# Altium PCB HS-IO-BaseBoard.PcbDoc (part 3 of 4)
Units mm, origin at the board's own origin, x right, y up, seen from the top; angles counter-clockwise.
Board outline 157.7 x 86.4 mm, 6 copper layers (Top Layer, MidLayer1, InternalPlane1, InternalPlane2, MidLayer2, Bottom Layer); 214 components, 240 nets, 782 pads, 260 vias.
Unrouted connection lines stored in the file: 101.
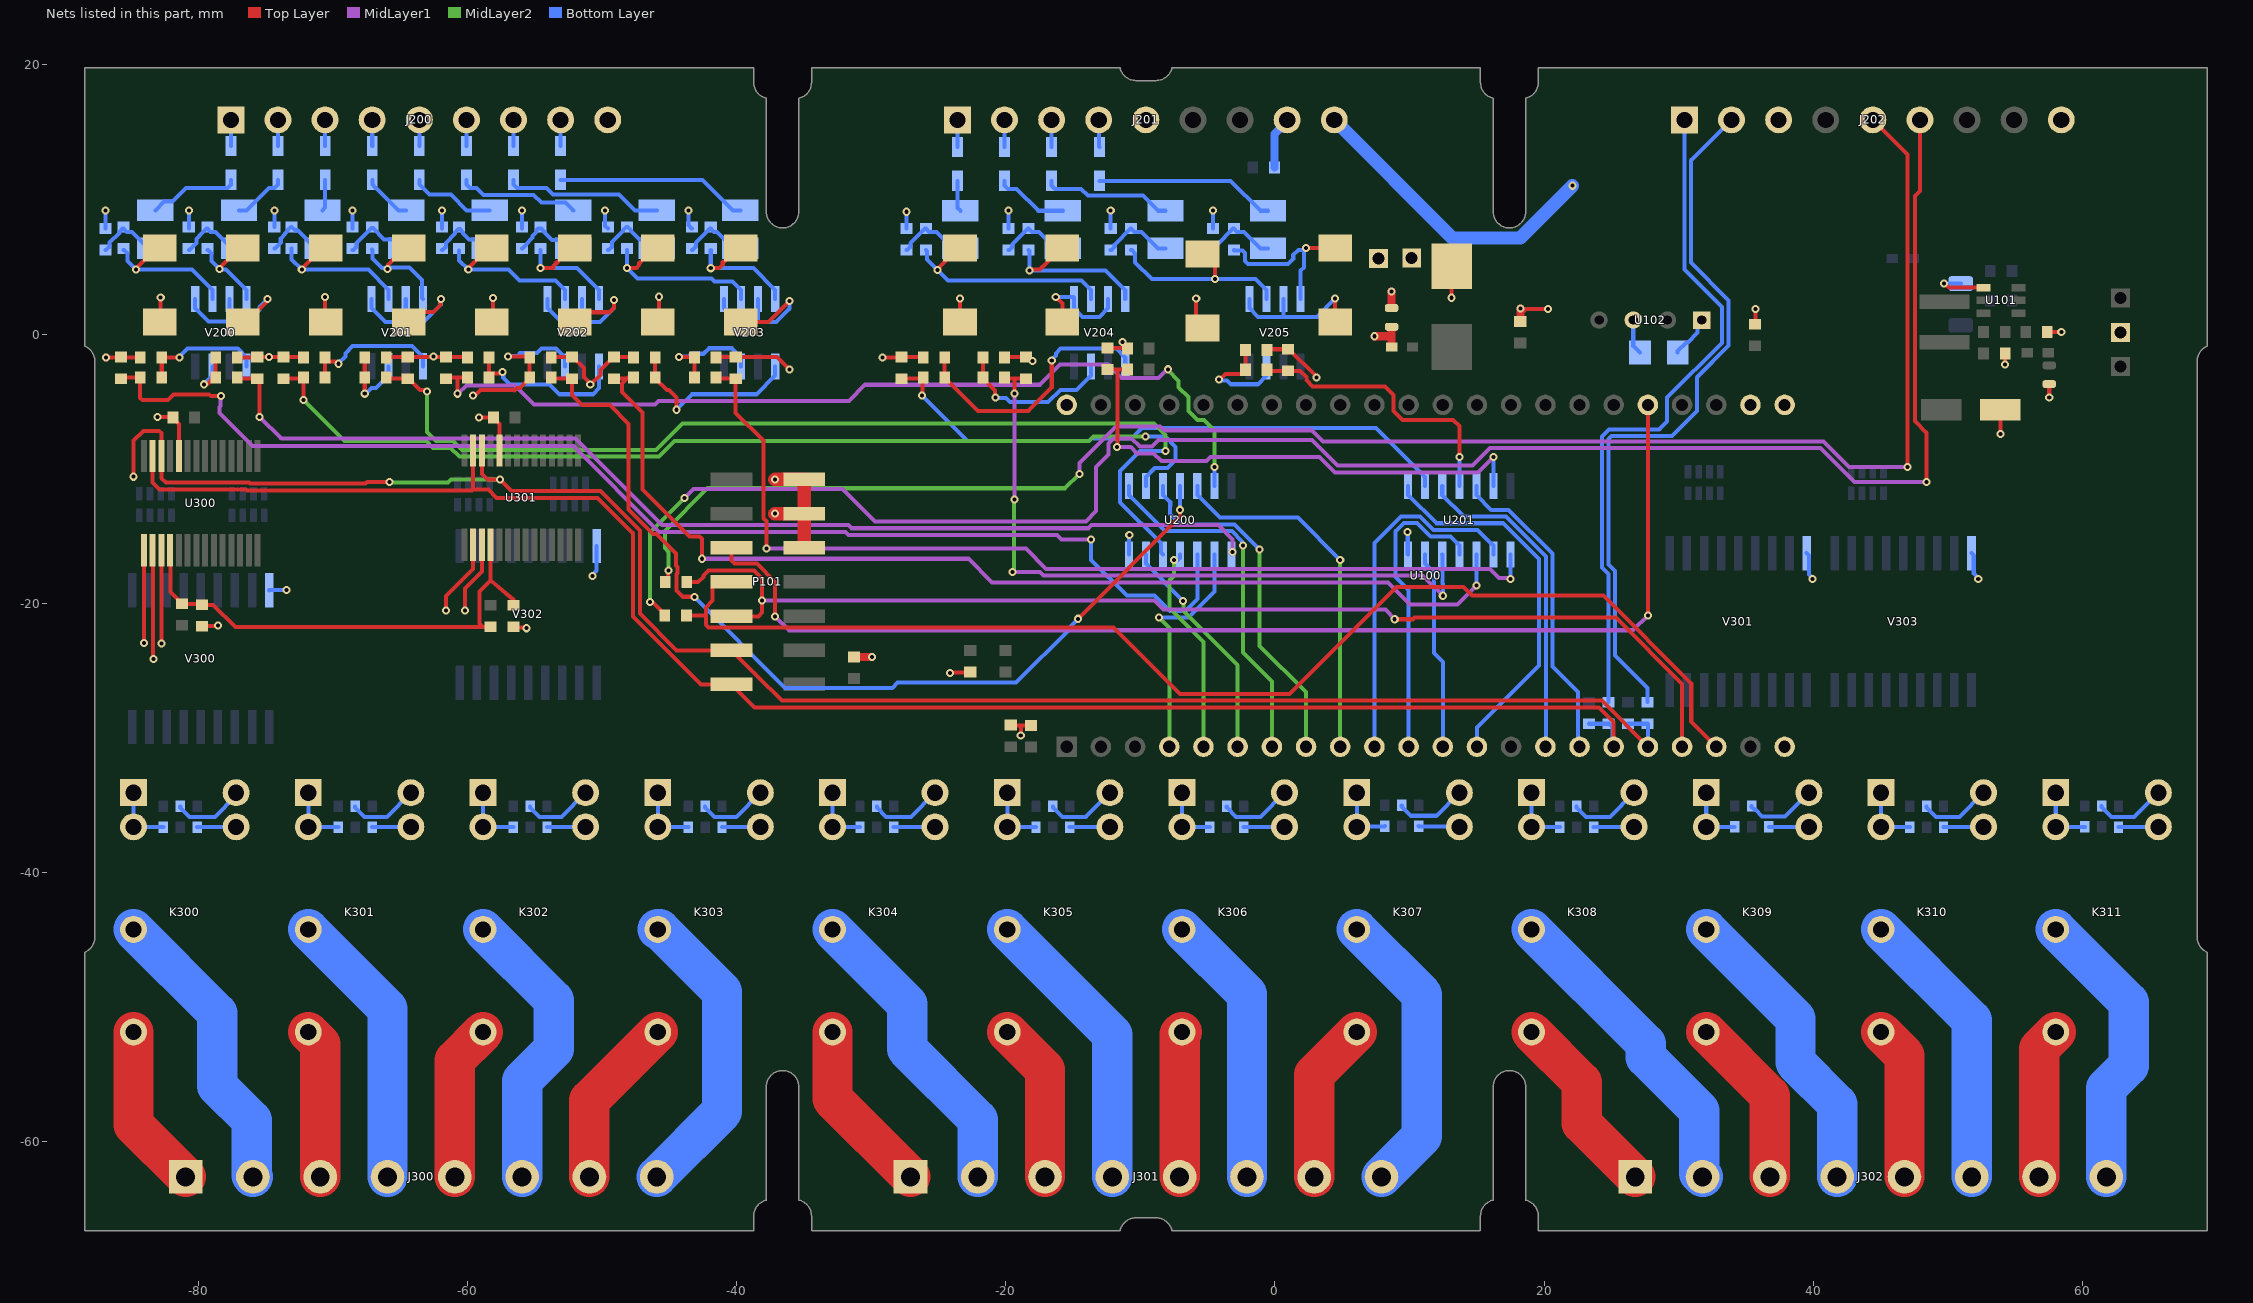
[diagram p6: the nets of this part, all layers, seen from the top]

## Via types
v1: diameter 0.6, hole 0.3, Top Layer to Bottom Layer, 260 vias

## Nets (pads, with @x,y where several pads share a name; then routed paths per layer and width w, separated by ;. In a path a pad name is that pad's centre, name@x,y a point inside that pad or via, vN(x,y) a via of type N, cw(c..) or ccw(c..) an arc to the next point about the centre after c; other vN are vias at no path point) (continued)
Gnd: C101.1 C102.2 C103.2 C104.2 C105.2 C106.1 C110.1 C111.2 C112.1 C113.1 C114.1 C200.2 C201.2 C202.2 C203.2 C204.2 C205.2 C206.2 C207.2 C208.2 C209.2 C210.2 C211.2 C300.1 C301.1 C302.1 C303.1 Gnd.1 J201.8 J201.9 J202.3 J202.9 P101.9 P101.11 P101.13 R102.1 R200.2 R204.2 R208.2 R212.2 R216.2 R220.2 R224.2 R228.2 R232.2 R236.2 R240.2 R244.2 U100.22 U100.23 U100.24 U100.44 U101.1 U102.1 U200.7 U201.7 U300.10 U300.15 U300.16 U300.17 U301.10 U301.16 U301.17 V300.9 V301.9 V302.9 V303.9 | length 149.1
  Top Layer w0.3: v1@-86.833,-1.729 R204.2@-84.325,-1.729 ; v1(-84.029,-22.946) U300.15@-84.029,-16.058 ; U300.16@-83.379,-16.058 -83.354,-16.083 -83.354,-24.115 v1(-83.329,-24.14) ; v1(-83.029,-6.15) -81.911,-6.15 C301.1@-81.864,-6.196 ; v1(-82.729,-22.983) U300.17@-82.729,-16.058 ; C301.1@-81.864,-6.246 -81.429,-6.682 U300.10@-81.429,-9.058 ; C302.1@-79.704,-21.698 -79.679,-21.673 -78.559,-21.673 v1(-78.534,-21.648) ; R200.2@-77.078,-1.729 C200.2@-75.63,-1.729 ; C200.2@-75.609,-1.708 -75.605,-1.704 -74.728,-1.704 v1(-74.724,-1.701) -74.72,-1.704 -73.672,-1.704 C203.2@-73.668,-1.708 -72.211,-1.708 R212.2@-72.168,-1.751 ; R208.2@-66.022,-1.751 -65.98,-1.708 C202.2@-64.427,-1.708 -62.548,-1.708 v1(-62.506,-1.667) -62.485,-1.688 -61.6,-1.688 C205.2@-61.579,-1.708 -60.025,-1.708 R220.2@-59.983,-1.751 ; v1(-61.6,-20.548) -61.6,-19.47 -59.565,-17.435 U301.16@-59.565,-15.641 ; v1(-60.188,-20.548) -60.188,-18.913 -58.915,-17.641 U301.17@-58.915,-15.641 ; v1(-59.14,-6.196) C303.1@-58.054,-6.196 -58.054,-6.246 -57.615,-6.685 U301.10@-57.615,-8.641 ; C300.1@-56.579,-21.748 -56.528,-21.799 -55.657,-21.799 v1(-55.606,-21.85) ; R216.2@-53.769,-1.751 -53.727,-1.708 -52.169,-1.708 -51.348,-2.53 -51.348,-3.197 -50.867,-3.678 v1(-50.867,-3.759) -50.842,-3.759 -50.121,-3.038 -50.121,-2.679 -49.151,-1.708 -47.689,-1.708 R228.2@-47.647,-1.751 ; R224.2@-41.516,-1.751 -41.474,-1.708 -37.004,-1.708 v1(-36.071,-2.642) ; v1(-29.15,-1.751) -29.129,-1.729 -27.773,-1.729 C209.2@-27.752,-1.708 -26.179,-1.708 R236.2@-26.137,-1.751 ; v1(-24.137,-25.178) -24.098,-25.14 -22.672,-25.14 C114.1@-22.633,-25.102 ; R232.2@-20.097,-1.751 -20.055,-1.708 C208.2@-18.443,-1.708 ; C112.1@-19.628,-29.048 -19.616,-29.061 -18.874,-29.061 ; v1(-18.886,-29.829) -18.874,-29.817 -18.874,-29.061 ; C208.2@-18.493,-1.708 C208.2@-18.443,-1.708 ; C111.2@-18.119,-29.073 -18.131,-29.061 -18.874,-29.061 ; v1(-18,-2) -18.076,-2.076 C208.2@-18.443,-1.708 ; C211.2@-12.454,-1.022 -10.999,-1.022 R244.2@-10.957,-1.064 -10.957,-1.014 -11.337,-0.635 v1(-11.337,-0.591) ; R240.2@-0.592,-1.167 -0.55,-1.125 C210.2@0.983,-1.125 ; C210.2@1.033,-1.125 3.072,-3.164 v1(3.072,-3.233) ; C106.1@35.671,0.741 35.691,0.761 v1(35.691,1.852) ; v1(49.702,3.758) 49.783,3.758 50.088,3.452 U101.1@52.651,3.452 ; C102.2@53.896,-5.608 53.921,-5.633 v1(53.921,-7.408) ; v1(54.251,-2.266) C101.1@54.251,-1.448 ; R102.1@57.376,0.152 57.384,0.16 v1(58.421,0.16) ; v1(57.526,-4.72) C103.2@57.526,-3.72
  Top Layer w0.6: v1(-86.854,-1.751) v1@-86.833,-1.729 ; R204.2@-84.325,-1.729 R204.2@-84.304,-1.751 ; R200.2@-77.099,-1.751 R200.2@-77.078,-1.729 ; C113.1@-31.279,-23.983 -29.934,-23.983 v1(-29.929,-23.988)
  Top Layer w1: v1(-37.147,-13.328) P101.11@-34.979,-13.328 ; v1(-37.147,-10.8) -37.135,-10.788 P101.13@-34.979,-10.788 P101.11@-34.979,-13.328 ; P101.9@-34.979,-15.868 P101.11@-34.979,-13.328
  Bottom Layer w0.3: V300.9@-74.724,-19.028 -74.695,-18.999 v1(-73.446,-18.999) ; v1(-50.705,-17.967) -50.705,-17.886 -50.399,-17.579 V302.9@-50.399,-15.736 ; U200.7@-10.849,-16.375 -10.835,-16.361 -10.835,-14.952 v1(-10.822,-14.939) ; v1(9.845,-14.689) 9.868,-14.711 9.868,-16.353 U201.7@9.89,-16.375 ; C110.1@29.921,-1.366 29.921,-1.266 30.571,-0.616 30.671,-0.616 31.409,0.122 31.409,0.755 U102.1@31.701,1.046 ; V301.9@39.501,-16.278 39.668,-16.446 39.668,-17.861 39.932,-18.124 v1(39.932,-18.206) ; v1(49.702,3.758) 49.704,3.755 50.948,3.755 C105.2@50.951,3.752 ; V303.9@51.751,-16.278 51.918,-16.446 51.918,-17.792 52.251,-18.124 v1(52.251,-18.206)
  Bottom Layer w0.6: C104.2@-0.04,12.367 -0.04,14.865 0.91,15.815 J201.8@0.91,15.917
  Bottom Layer w1: J201.9@4.41,15.917 13.185,7.142 18.229,7.142 22.092,11.005 v1(22.092,11.025)
GPIO13: P101.6 R248.2 U100.19 | length 86.9
  Top Layer w0.3: R248.2@-43.7,-18.417 -42.85,-18.417 -42.462,-18.029 -42.462,-17.946 -42.074,-17.558 -38.684,-17.558 -38.096,-18.147 -38.096,-20.695 -38.366,-20.965 -40.363,-20.965 P101.6@-40.379,-20.948 ; v1(8.9,-21.185) 10.257,-21.185 10.383,-21.058 25.33,-21.058 30.25,-25.979 U100.19@30.25,-30.658
  MidLayer1 w0.3: v1(-38.096,-19.803) -8.945,-19.803 -8.281,-20.467 8.203,-20.467 8.9,-21.164 v1(8.9,-21.185)
GPIO14: P101.8 R249.2 U100.20 | length 93.1
  Top Layer w0.3: R249.2@-43.727,-20.894 -42.334,-20.894 -42.279,-20.948 ; P101.8@-40.379,-18.408 -41.429,-18.408 -41.779,-18.758 -41.779,-19.803 -42.279,-20.303 -42.279,-20.948 ; U100.20@32.79,-30.658 30.928,-28.796 30.928,-25.95 24.404,-19.425 14.659,-19.425 14.021,-18.787 9.013,-18.787 1.067,-26.733 -7.05,-26.733 -11.985,-21.798 -42.074,-21.798 -42.279,-21.593 -42.279,-20.948
GPIO21: P101.10 U100.27 | length 88.8
  Top Layer w0.3: P101.10@-40.379,-15.868 -40.379,-16.818 -40.139,-17.058 -38.477,-17.058 -37.129,-18.406 v1(-37.129,-20.978) ; v1(27.71,-20.9) U100.27@27.71,-5.258
  MidLayer1 w0.3: v1@-37.051,-21.057 -36.108,-22 26.61,-22 v1(27.71,-20.9)
  MidLayer2 w0.3: v1(-37.129,-20.978) v1@-37.051,-20.9
I01: D201.2 J200.1 | length 2
  Bottom Layer w0.3: D201.2@-77.568,13.967 J200.1@-77.568,15.917
I02: D203.2 J200.2 | length 2
  Bottom Layer w0.3: D203.2@-74.068,13.967 J200.2@-74.068,15.917
"I2C SCL": P101.4 R105.1 R253.2 U100.18 U300.12 U301.12 | length 137.5
  Top Layer w0.3: v1(-84.799,-10.594) -84.799,-7.909 -84.075,-7.184 -82.905,-7.184 -82.729,-7.36 U300.12@-82.729,-9.058 -82.729,-10.708 -82.402,-11.035 -76.229,-11.035 -76.156,-11.108 -67.567,-11.108 -67.434,-10.976 v1(-65.772,-10.976) ; U301.12@-58.915,-8.641 -58.915,-10.379 -58.506,-10.788 -57.591,-10.788 v1(-57.588,-10.788) ; v1(-57.588,-10.788) -56.718,-11.658 -50.108,-11.658 -47.179,-14.588 -47.179,-20.771 -44.462,-23.488 P101.4@-40.379,-23.488 -38.689,-25.178 -38.684,-25.178 -38.479,-25.383 -38.479,-25.388 -36.634,-27.233 24.285,-27.233 U100.18@27.71,-30.658
  MidLayer2 w0.3: v1(-65.772,-10.976) -65.732,-11.016 -61.427,-11.016 -61.199,-10.788 v1(-57.588,-10.788)
  Bottom Layer w0.3: R105.1@26.229,-28.948 R253.2@27.683,-28.948 27.71,-28.975 U100.18@27.71,-30.658
"I2C SCL_1": J202.2 R253.1 | length 53.2
  Bottom Layer w0.3: R253.1@27.683,-27.348 27.683,-26.287 25.275,-23.879 25.275,-17.613 24.788,-17.126 24.788,-7.808 25.018,-7.578 29.503,-7.578 31.362,-5.719 31.362,-3.204 33.714,-0.853 33.714,2.513 30.921,5.306 30.921,12.917 J202.2@33.921,15.917
"I2C SDA": P101.2 R104.1 R252.2 U100.17 U300.13 U301.13 | length 129.6
  Top Layer w0.3: U300.13@-83.379,-9.058 -83.378,-9.06 -83.378,-11.012 -82.854,-11.535 -76.436,-11.535 -76.363,-11.608 -67.234,-11.608 -67.217,-11.626 -59.656,-11.626 -59.565,-11.535 -58.446,-11.535 ; -59.565,-11.505 U301.13@-59.565,-8.641 ; -58.425,-11.557 -57.823,-12.158 -50.316,-12.158 -47.679,-14.795 -47.679,-20.978 -42.629,-26.028 P101.2@-40.379,-26.028 -38.674,-27.733 24.078,-27.733 25.17,-28.826 U100.17@25.17,-30.658
  Bottom Layer w0.3: R104.1@23.321,-28.948 R252.2@24.775,-28.948 ; R252.2@24.825,-28.948 25.075,-29.198 25.075,-30.563 U100.17@25.17,-30.658
"I2C SDA_1": J202.1 R252.1 | length 50.5
  Bottom Layer w0.3: R252.1@24.775,-27.348 24.775,-17.82 24.288,-17.333 24.288,-7.601 24.811,-7.078 28.551,-7.078 29.138,-6.491 29.138,-4.721 33.214,-0.646 33.214,2.009 30.421,4.801 J202.1@30.421,15.917
I2C_R\E\S\E\T\: C300.2 C302.2 R302.1 R306.1 U300.18 U301.18 | length 37.2
  Top Layer w0.3: U300.18@-82.079,-16.058 -82.054,-16.084 -82.054,-19.176 R302.1@-81.204,-20.025 ; R302.1@-81.226,-20.003 -81.168,-20.062 -79.741,-20.062 -79.694,-20.108 -78.879,-20.108 -77.239,-21.748 -58.842,-21.748 ; R306.1@-58.269,-21.748 -58.842,-21.748 ; U301.18@-58.265,-15.641 -58.265,-18.309 ; C300.2@-56.579,-20.148 -56.579,-19.73 -58.265,-18.309 ; -58.842,-21.748 -59.092,-21.498 -59.092,-19.136 -58.265,-18.309
I03: D205.2 J200.3 | length 2
  Bottom Layer w0.3: J200.3@-70.568,15.917 -70.563,15.911 -70.563,13.972 D205.2@-70.558,13.967
I04: D207.2 J200.4 | length 2
  Bottom Layer w0.3: J200.4@-67.068,15.917 -67.065,15.913 -67.065,13.97 D207.2@-67.061,13.967
I05: D209.2 J200.5 | length 2
  Bottom Layer w0.3: J200.5@-63.568,15.917 J200.5@-63.568,15.917 -63.566,13.968 D209.2@-63.565,13.967
I5V: C109.1 D200.2 D202.2 D204.2 D206.2 D208.2 D210.2 D212.2 D214.2 D216.2 D218.2 D220.2 D222.2 I5V.1 L103.2 R201.1 R205.1 R209.1 R213.1 R217.1 R221.1 R225.1 R229.1 R233.1 R237.1 R241.1 R245.1 V200.1 V200.3 V201.1 V201.3 V202.1 V202.3 V203.1 V203.3 V204.1 V204.3 V205.1 V205.3 | length 99.6
  Top Layer w0.3: D200.2@-82.854,0.891 -82.779,0.966 v1(-82.779,2.736) ; D202.2@-76.686,0.891 -76.436,0.891 -74.894,2.434 -74.894,2.543 v1(-74.836,2.6) ; v1(-70.568,2.745) -70.568,0.941 D204.2@-70.519,0.891 ; D206.2@-64.351,0.891 -63.609,1.633 -62.511,1.633 -61.983,2.162 -61.983,2.594 v1(-61.969,2.608) ; D208.2@-58.183,0.891 -58.088,0.987 v1(-58.088,2.676) ; D210.2@-52.015,0.891 -51.281,1.625 -49.425,1.625 -49.107,1.943 v1(-49.107,2.527) ; D212.2@-45.847,0.891 -45.76,0.979 v1(-45.76,2.777) ; D214.2@-39.679,0.891 -39.665,0.905 -37.612,0.905 v1(-36.071,2.446) ; D216.2@-23.402,0.741 v1(-23.402,2.642) ; v1(-16.285,2.767) -15.793,2.274 D218.2@-15.793,0.741 ; v1(-5.848,2.641) -5.848,0.908 D220.2@-5.383,0.442 ; D222.2@4.478,0.825 v1(4.478,2.641)
  Top Layer w0.6: v1(7.401,-0.159) 8.669,-0.159 ; L103.2@8.669,-0.959 8.669,-0.159 ; C109.1@8.669,0.541 8.669,-0.159
  Bottom Layer w0.3: R201.1@-86.879,7.842 v1(-86.879,9.192) ; R205.1@-80.693,7.842 v1(-80.693,9.192) ; V200.1@-80.216,2.6 -80.216,1.925 -79.233,0.941 -77.662,0.941 ; V200.3@-77.676,2.6 -77.676,0.956 -77.662,0.941 ; v1(-74.836,2.6) -75.428,2.009 -75.428,1.809 -76.295,0.941 -77.662,0.941 ; R209.1@-74.343,7.967 -74.318,7.992 v1(-74.318,9.192) ; R213.1@-68.519,7.842 v1(-68.519,9.192) ; V201.1@-67.116,2.608 -67.116,1.933 -66.074,0.891 -64.601,0.891 ; V201.3@-64.576,2.608 -64.576,0.916 -64.601,0.891 ; v1(-61.969,2.608) -61.983,2.594 -61.983,2.162 -63.253,0.891 -64.601,0.891 ; R217.1@-61.889,7.842 v1(-61.889,9.192) ; R221.1@-55.951,7.842 v1(-55.951,9.192) ; V202.1@-54.029,2.6 -54.029,1.925 -52.996,0.891 -51.503,0.891 ; V202.3@-51.489,2.6 -51.489,0.905 -51.503,0.891 ; v1(-49.765,9.192) -49.765,8.045 R225.1@-49.557,7.837 ; v1(-49.107,2.527) -49.107,1.943 -50.158,0.891 -51.503,0.891 ; v1(-43.579,9.192) -43.579,8.103 -43.329,7.853 R229.1@-43.313,7.853 ; V203.1@-40.936,2.6 -40.936,1.925 -39.916,0.905 -38.429,0.905 ; V203.3@-38.396,2.6 -38.396,0.939 -38.429,0.905 ; v1(-36.071,2.446) -36.071,1.885 -37.051,0.905 -38.429,0.905 ; R233.1@-27.377,7.842 v1(-27.377,9.092) ; R237.1@-19.788,7.842 v1(-19.788,9.192) ; v1@-16.119,2.6 v1(-16.285,2.767) -14.982,2.767 -14.932,2.717 -14.932,1.925 -14.282,1.275 -13.042,1.275 -12.392,1.925 V204.3@-12.392,2.6 ; R241.1@-12.2,7.842 v1(-12.2,9.192) ; R245.1@-4.611,7.842 v1(-4.611,9.192) ; V205.1@-1.895,2.6 -1.895,1.925 -1.245,1.275 0.645,1.275 ; V205.3@0.645,2.6 0.645,1.275 ; v1(4.478,2.641) 3.111,1.275 0.645,1.275
I06: D211.2 J200.6 | length 2
  Bottom Layer w0.3: D211.2@-60.068,13.967 J200.6@-60.068,15.917
I07: D213.2 J200.7 | length 2
  Bottom Layer w0.3: D213.2@-56.572,13.967 -56.57,13.969 -56.57,15.915 J200.7@-56.568,15.917
I08: D215.2 J200.8 | length 2
  Bottom Layer w0.3: D215.2@-53.076,13.967 -53.072,13.97 -53.072,15.913 J200.8@-53.068,15.917
I09: D217.2 J201.1 | length 2
  Bottom Layer w0.3: D217.2@-23.59,13.892 J201.1@-23.59,15.917
I10: D219.2 J201.2 | length 2
  Bottom Layer w0.3: D219.2@-20.09,13.892 J201.2@-20.09,15.917
I11: D221.2 J201.3 | length 2
  Bottom Layer w0.3: D221.2@-16.59,13.892 J201.3@-16.59,15.917
I12: D223.2 J201.4 | length 2.1
  Bottom Layer w0.3: J201.4@-13.09,15.917 -13.059,15.885 -13.059,13.923 D223.2@-13.027,13.892
I-GND: C107.2 C108.1 C109.2 C110.2 I-GND.1 J200.9 J201.5 U102.3 | length 9.9
  Top Layer w0.3: v1(13.129,2.702) C107.2@13.129,5.041 ; C108.1@18.229,0.941 18.229,1.464 18.635,1.87 v1(20.283,1.87)
  Top Layer w0.6: C109.2@8.669,1.941 v1(8.669,3.161) ; C108.1@18.229,0.941 v1(18.229,1.912)
  Bottom Layer w0.3: U102.3@26.621,1.046 26.621,-0.866 C110.2@27.121,-1.366
INP1: U100.4 U200.2 | length 17.6
  MidLayer2 w0.3: v1(-8.609,-21.058) -7.85,-21.818 U100.4@-7.85,-30.658
  Bottom Layer w0.3: v1(-8.609,-21.058) -6.433,-21.058 -4.499,-19.124 U200.2@-4.499,-16.375
INP2: U100.5 U200.4 | length 15.8
  MidLayer2 w0.3: v1(-7.509,-16.787) -7.509,-17.957 -7.839,-18.287 -7.839,-20.348 -5.31,-22.878 U100.5@-5.31,-30.658
  Bottom Layer w0.3: v1(-7.509,-16.787) -7.189,-16.787 -7.039,-16.637 U200.4@-7.039,-16.375
INP3: U100.6 U200.6 | length 17.1
  MidLayer2 w0.3: v1(-6.818,-19.817) -6.803,-19.833 -6.803,-20.567 -2.77,-24.601 U100.6@-2.77,-30.658
  Bottom Layer w0.3: U200.6@-9.579,-16.375 -9.579,-17.05 -6.818,-19.811 v1(-6.818,-19.817)
INP4: U100.7 U200.8 | length 26.7
  MidLayer2 w0.3: v1(-2.377,-15.69) -2.377,-23.646 -0.23,-25.793 U100.7@-0.23,-30.658
  Bottom Layer w0.3: U200.8@-10.849,-11.275 -10.849,-11.95 -8.165,-14.634 -3.2,-14.634 -2.434,-15.4 -2.434,-15.633 v1(-2.377,-15.69)
INP5: U100.8 U200.10 | length 26.1
  MidLayer2 w0.3: v1(-1.132,-16.015) -1.132,-23.159 2.31,-26.602 U100.8@2.31,-30.658
  Bottom Layer w0.3: U200.10@-8.309,-11.275 -8.309,-11.95 -7.779,-12.48 -7.779,-12.729 -7.789,-12.739 -7.789,-13.361 -7.016,-14.134 -3.433,-14.134 -2.993,-14.134 -1.132,-15.995 v1(-1.132,-16.015)
INP6: U100.9 U200.12 | length 27.2
  MidLayer2 w0.3: U100.9@4.85,-30.658 v1(4.85,-16.787)
  Bottom Layer w0.3: U200.12@-5.769,-11.275 -5.769,-11.95 -4.085,-13.634 1.698,-13.634 v1(4.85,-16.787)
INP7: U100.10 U201.2 | length 26.4
  Bottom Layer w0.3: U100.10@7.39,-30.658 7.39,-15.517 9.369,-13.539 10.771,-13.539 11.783,-14.55 15.049,-14.55 16.049,-15.55 16.09,-15.55 16.24,-15.7 U201.2@16.24,-16.375
INP8: U100.11 U201.4 | length 22.8
  Bottom Layer w0.3: U100.11@9.93,-30.658 9.93,-18.999 8.968,-18.037 8.968,-14.647 9.576,-14.039 10.564,-14.039 11.576,-15.05 13.05,-15.05 13.7,-15.7 U201.4@13.7,-16.375
INP9: U100.12 U201.6 | length 14.8
  Bottom Layer w0.3: U201.6@11.16,-16.375 11.16,-17.05 11.82,-17.71 11.82,-23.694 12.47,-24.344 U100.12@12.47,-30.658
INP10: U100.13 U201.8 | length 28.2
  Bottom Layer w0.3: U201.8@9.89,-11.275 9.89,-11.95 11.99,-14.05 16.955,-14.05 19.625,-16.72 19.625,-24.606 15.01,-29.221 U100.13@15.01,-30.658
INP11: U100.15 U201.10 | length 24.4
  Bottom Layer w0.3: U201.10@12.43,-11.275 12.43,-11.95 14.03,-13.55 17.162,-13.55 20.125,-16.513 20.125,-30.624 U100.15@20.09,-30.658
INP12: U100.16 U201.12 | length 23.3
  Bottom Layer w0.3: U201.12@14.97,-11.275 14.97,-11.95 16.07,-13.05 17.369,-13.05 20.625,-16.306 20.625,-24.688 22.521,-26.583 22.521,-30.549 U100.16@22.63,-30.658
IO13: J202.5 R248.1 | length 128.1
  Top Layer w0.3: R248.1@-45.3,-18.417 -45.102,-18.219 -45.102,-17.616 v1(-45.044,-17.559) ; J202.5@44.421,15.917 46.988,13.349 v1(46.988,-9.879)
  MidLayer1 w0.3: v1(-14.527,-10.383) -14.527,-9.576 -11.822,-6.87 -9.722,-6.87 -9.714,-6.862 -8.526,-6.862 -8.247,-7.141 2.732,-7.141 3.567,-7.975 40.742,-7.975 42.646,-9.879 v1(46.988,-9.879)
  MidLayer2 w0.3: v1(-45.044,-17.559) -45.044,-16.189 -45.327,-15.906 -45.327,-14.618 -42.159,-11.45 -15.594,-11.45 v1(-14.527,-10.383)
IO14: J202.6 R249.1 | length 139.1
  Top Layer w0.3: v1(-46.44,-19.9) -46.383,-19.957 -46.213,-19.957 -45.327,-20.844 R249.1@-45.327,-20.894 ; J202.6@47.921,15.917 47.921,10.629 47.551,10.259 47.551,-6.458 48.421,-7.328 v1(48.421,-10.983)
  MidLayer1 w0.3: v1(-43.853,-12.166) -43.203,-11.516 -32.132,-11.516 -29.726,-13.922 -14.053,-13.922 -13.288,-13.157 -13.288,-9.872 -12.375,-8.959 -12.375,-8.131 -11.994,-7.75 -10.655,-7.75 -10.043,-8.362 -9.137,-8.362 -8.649,-7.875 2.759,-7.875 4.659,-9.775 14.667,-9.775 15.967,-8.475 40.535,-8.475 43.044,-10.983 v1(48.421,-10.983)
  MidLayer2 w0.3: v1(-46.44,-19.9) -46.44,-14.753 v1(-43.853,-12.166)
K1A: J300.1 K300.8 | length 12.4
  Top Layer w3: K300.8@-84.799,-51.848 -84.799,-58.738 J300.1@-80.929,-62.608
K1B: J300.2 K300.5 | length 22.1
  Bottom Layer w3: K300.5@-84.799,-44.228 -78.579,-50.448 -78.579,-55.858 -76.025,-58.413 -76.025,-62.513 J300.2@-75.929,-62.608
K2A: J300.3 K301.8 | length 11.1
  Top Layer w3: K301.8@-71.816,-51.848 -70.929,-52.736 J300.3@-70.929,-62.608
K2B: J300.4 K301.5 | length 20.8
  Bottom Layer w3: K301.5@-71.816,-44.228 -65.929,-50.116 J300.4@-65.929,-62.608
K3A: J300.5 K302.8 | length 11.6
  Top Layer w3: J300.5@-60.929,-62.608 -60.929,-53.944 K302.8@-58.834,-51.848
K3B: J300.6 K302.5 | length 21.5
  Bottom Layer w3: K302.5@-58.834,-44.228 -53.579,-49.483 -53.579,-53.108 -55.929,-55.458 J300.6@-55.929,-62.608
K4A: J300.7 K303.8 | length 12.9
  Top Layer w3: J300.7@-50.929,-62.608 -50.929,-56.927 K303.8@-45.851,-51.848
K4B: J300.8 K303.5 | length 22.4
  Bottom Layer w3: J300.8@-45.929,-62.608 -41.079,-57.758 -41.079,-48.858 -45.709,-44.228 K303.5@-45.851,-44.228
K5A: J301.1 K304.8 | length 13.2
  Top Layer w3: K304.8@-32.868,-51.848 -32.868,-56.819 J301.1@-27.079,-62.608
K5B: J301.2 K304.5 | length 22.8
  Bottom Layer w3: K304.5@-32.868,-44.228 -27.329,-49.768 -27.329,-53.108 -22.079,-58.358 J301.2@-22.079,-62.608
K6A: J301.3 K305.8 | length 11.9
  Top Layer w3: K305.8@-19.886,-51.848 -17.079,-54.655 J301.3@-17.079,-62.608
K6B: J301.4 K305.5 | length 21.6
  Bottom Layer w3: K305.5@-19.886,-44.228 -12.079,-52.035 J301.4@-12.079,-62.608
K7A: J301.5 K306.8 | length 10.8
  Top Layer w3: J301.5@-7.079,-62.608 -7.079,-52.025 K306.8@-6.903,-51.848
K7B: J301.6 K306.5 | length 20.4
  Bottom Layer w3: K306.5@-6.903,-44.228 -2.079,-49.052 J301.6@-2.079,-62.608
K8A: J301.7 K307.8 | length 12.1
  Top Layer w3: J301.7@2.921,-62.608 2.921,-55.008 K307.8@6.08,-51.848
K8B: J301.8 K307.5 | length 21.6
  Bottom Layer w3: K307.5@6.08,-44.228 10.921,-49.069 10.921,-59.598 7.921,-62.598 J301.8@7.921,-62.608
K9A: J302.1 K308.8 | length 14
  Top Layer w3: K308.8@19.063,-51.848 22.792,-55.578 22.792,-58.629 J302.1@26.771,-62.608
K9B: J302.2 K308.5 | length 23.6
  Bottom Layer w3: K308.5@19.063,-44.228 27.545,-52.711 27.545,-53.712 31.521,-57.688 31.521,-62.358 J302.2@31.771,-62.608
K10A: J302.3 K309.8 | length 12.7
  Top Layer w3: K309.8@32.045,-51.848 36.771,-56.574 J302.3@36.771,-62.608
K10B: J302.4 K309.5 | length 22.4
  Bottom Layer w3: K309.5@32.045,-44.228 38.671,-50.854 38.671,-54.108 41.771,-57.208 J302.4@41.771,-62.608
K11A: J302.5 K310.8 | length 11.5
  Top Layer w3: K310.8@45.028,-51.848 46.771,-53.591 J302.5@46.771,-62.608
K11B: J302.6 K310.5 | length 21.2
  Bottom Layer w3: K310.5@45.028,-44.228 51.771,-50.971 J302.6@51.771,-62.608
K12A: J302.7 K311.8 | length 11.3
  Top Layer w3: J302.7@56.771,-62.608 56.771,-53.088 K311.8@58.011,-51.848
K12B: J302.8 K311.5 | length 21.3
  Bottom Layer w3: K311.5@58.011,-44.228 63.421,-49.638 63.421,-54.358 61.771,-56.008 J302.8@61.771,-62.608
NetC200_1: C200.1 R202.2 U200.1 | length 81.9
  Top Layer w0.3: R202.2@-77.099,-3.233 -77.024,-3.308 C200.1@-75.609,-3.308 -75.526,-3.392 -75.442,-3.476 -75.442,-6.175 v1(-75.442,-6.15)
  MidLayer1 w0.3: v1(-75.442,-6.15) -73.824,-7.768 -51.957,-7.768 -45.536,-14.189 -31.695,-14.189 -31.461,-14.422 -13.846,-14.422 -13.612,-14.189 -4.206,-14.189 -3.149,-15.246 v1(-3.149,-16.187)
  Bottom Layer w0.3: U200.1@-3.229,-16.375 -3.149,-16.294 v1(-3.149,-16.187)
NetC201_1: C201.1 R207.2 U200.3 | length 93.9
  Top Layer w0.3: C201.1@-85.729,-3.308 -85.654,-3.233 R207.2@-84.304,-3.233 -84.304,-4.733 -84.128,-4.908 -82.254,-4.908 -81.815,-4.469 -79.188,-4.469 -79.055,-4.603 v1(-78.288,-4.603)
  MidLayer1 w0.3: v1(-78.288,-4.603) -78.345,-4.66 -78.345,-5.341 -78.422,-5.418 -78.422,-5.852 -75.957,-8.316 -52.116,-8.316 -45.743,-14.689 -31.902,-14.689 -31.668,-14.922 -16.185,-14.922 -15.852,-15.255 v1(-13.662,-15.255)
  Bottom Layer w0.3: v1(-13.662,-15.255) -13.662,-16.774 -11.002,-19.433 -8.934,-19.433 -7.809,-20.558 -6.64,-20.558 -5.769,-19.687 U200.3@-5.769,-16.375
NetC202_1: C202.1 R210.2 U200.5 | length 75.8
  Top Layer w0.3: R210.2@-66.022,-3.233 -65.947,-3.308 -64.377,-3.308 -63.531,-4.154 -63.096,-4.154 v1(-63,-4.25)
  MidLayer2 w0.3: v1(-63,-4.25) -63,-7.282 -62.337,-7.945 -61.051,-7.945 -60.388,-8.608 -45.967,-8.608 -44.002,-6.644 -8.987,-6.644 -8.132,-7.499 v1(-8.132,-8.686)
  Bottom Layer w0.3: U200.5@-8.309,-16.375 -8.459,-16.225 -8.459,-15.532 -11.499,-12.492 -11.499,-10.155 -10.03,-8.686 v1(-8.132,-8.686)
NetC203_1: C203.1 R215.2 U200.9 | length 75
  Top Layer w0.3: C203.1@-73.668,-3.308 -72.243,-3.308 R215.2@-72.168,-3.233 v1@-72.168,-4.933
  MidLayer2 w0.3: v1(-72.168,-4.908) -69.119,-7.957 -63.031,-7.957 -62.544,-8.445 -61.259,-8.445 -60.595,-9.108 -45.76,-9.108 -44.595,-7.944 -13.821,-7.944 -13.49,-7.612 v1(-9.611,-7.612)
  Bottom Layer w0.3: v1(-9.611,-7.612) -8.144,-7.612 -7.382,-8.375 -7.382,-9.335 -7.997,-9.95 -8.929,-9.95 -9.579,-10.6 U200.9@-9.579,-11.275
NetC204_1: C204.1 R218.2 U200.11 | length 70
  Top Layer w0.3: R218.2@-53.769,-3.233 -53.694,-3.308 C204.1@-52.219,-3.308 -52.219,-4.519 -51.471,-5.267 -49.415,-5.267 -48.018,-6.664 -48.018,-13.042 -46.221,-14.839 -45.96,-14.839 -44.5,-16.299 -44.5,-17.181 -44.394,-17.287 -44.394,-17.766 -44.45,-17.822 -44.45,-19.038 -43.976,-19.513 -43.155,-19.513 v1(-43.126,-19.542) ; v1(-14.632,-21.148) -7.039,-13.556 v1(-7.039,-13.05)
  Bottom Layer w0.3: v1(-43.126,-19.542) -36.389,-26.278 -28.431,-26.278 -28.031,-25.878 -19.224,-25.878 -15.199,-21.854 -15.199,-21.716 v1(-14.632,-21.148) ; v1(-7.039,-13.05) U200.11@-7.039,-11.275
NetC205_1: C205.1 R223.2 U200.13 | length 68.7
  Top Layer w0.3: C205.1@-61.579,-3.308 -61.504,-3.233 -60.737,-3.233 ; v1(-60.737,-4.428) -60.737,-3.233 ; R223.2@-59.983,-3.233 -60.737,-3.233
  MidLayer1 w0.3: v1(-60.737,-4.428) -60.684,-4.428 -60.074,-3.818 -56.462,-3.818 -55.049,-5.232 -46.056,-5.232 -45.793,-4.968 -31.655,-4.968 -30.447,-3.76 -17.448,-3.76 -15.958,-2.271 -12.384,-2.271 -11.405,-3.25 -8.639,-3.25 -8.001,-2.613 v1(-7.952,-2.613)
  MidLayer2 w0.3: v1(-7.952,-2.613) -7.952,-2.679 -7.161,-3.471 -7.161,-3.947 -6.422,-4.686 -6.422,-5.719 -5.77,-6.37 -5.267,-6.37 -4.479,-7.158 v1(-4.479,-9.875)
  Bottom Layer w0.3: U200.13@-4.499,-11.275 -4.489,-11.265 -4.489,-9.885 v1(-4.479,-9.875)
NetC206_1: C206.1 R226.2 U201.1 | length 73.1
  Top Layer w0.3: R226.2@-41.516,-3.233 -41.441,-3.308 C206.1@-40.062,-3.308 -40.062,-5.877 ; -40.062,-5.852 -37.997,-7.917 -37.997,-13.681 -37.779,-13.898 v1(-37.779,-15.939)
  MidLayer1 w0.3: v1(-37.779,-15.939) -18.497,-15.939 -16.999,-17.437 15.988,-17.437 16.661,-18.11 17.414,-18.11 v1(17.51,-18.206)
  Bottom Layer w0.3: v1(17.51,-18.206) U201.1@17.51,-16.375
NetC207_1: C207.1 R231.2 U201.3 | length 79.7
  Top Layer w0.3: C207.1@-49.101,-3.308 -48.146,-3.308 ; R231.2@-47.647,-3.233 -48.071,-3.233 -48.146,-3.308 ; v1(-42.567,-16.689) -42.567,-15.203 -42.743,-15.028 -43.49,-15.028 -46.976,-11.541 -46.976,-5.831 -48.5,-4.307 -48.5,-3.663 -48.146,-3.308
  MidLayer1 w0.3: v1(-42.567,-16.689) -22.765,-16.689 -21.017,-18.437 8.402,-18.437 10.052,-20.087 13.558,-20.087 v1(14.97,-18.675)
  Bottom Layer w0.3: v1(14.97,-18.675) U201.3@14.97,-16.375
NetC208_1: C208.1 R234.2 U201.5 | length 51.9
  Top Layer w0.3: R234.2@-20.097,-3.233 -20.022,-3.308 -19.257,-3.308 ; v1(-19.338,-4.41) -19.338,-3.389 -19.257,-3.308 ; C208.1@-18.493,-3.308 -19.257,-3.308
  MidLayer1 w0.3: v1(-19.488,-17.687) -17.456,-17.687 -17.206,-17.937 10.97,-17.937 v1(12.47,-19.437) ; v1(-19.338,-12.272) v1(-19.338,-4.41)
  MidLayer2 w0.3: v1(-19.488,-17.687) -19.396,-17.594 -19.396,-12.33 v1(-19.338,-12.272)
  Bottom Layer w0.3: U201.5@12.43,-16.375 12.45,-16.395 12.45,-18.537 12.47,-18.557 v1(12.47,-19.437)
NetC209_1: C209.1 R239.2 U201.9 | length 44.2
  Top Layer w0.3: C209.1@-27.752,-3.308 -26.212,-3.308 -26.174,-3.346 v1@-26.174,-4.568 ; R239.2@-26.174,-3.271 R239.2@-26.137,-3.233
  Bottom Layer w0.3: v1(-26.212,-4.568) -22.836,-7.944 -13.821,-7.944 -13.628,-7.75 -10.668,-7.75 -9.88,-6.962 7.522,-6.962 11.16,-10.6 U201.9@11.16,-11.275
NetC210_1: C210.1 R242.2 U201.11 | length 21.6
  Top Layer w0.3: R242.2@-0.592,-2.65 -0.592,-2.881 -0.436,-2.725 1.857,-2.725 2.33,-3.198 2.33,-3.41 2.803,-3.883 8.184,-3.883 8.818,-4.518 8.818,-5.719 9.47,-6.37 13.231,-6.37 13.7,-6.839 v1(13.7,-9.125)
  Bottom Layer w0.3: U201.11@13.7,-11.275 v1(13.7,-9.125)
NetC211_1: C211.1 R247.2 U201.13 | length 38.9
  Top Layer w0.3: C211.1@-12.454,-2.622 -11.69,-2.622 ; v1(-11.725,-8.4) -11.686,-8.361 -11.686,-2.93 -11.69,-2.925 -11.69,-2.622 ; R247.2@-10.957,-2.622 -11.69,-2.622
  MidLayer1 w0.3: v1(-11.725,-8.4) -10.712,-8.4 -10.25,-8.862 -9.016,-8.862 -8.442,-9.436 -5.101,-9.436 -4.79,-9.125 3.302,-9.125 4.452,-10.275 15.086,-10.275 v1(16.236,-9.125)
  Bottom Layer w0.3: v1(16.236,-9.125) 16.236,-9.875 16.238,-9.877 16.238,-11.273 U201.13@16.24,-11.275
NetD200_1: D200.1 R203.2 V200.2 | length 11.3
  Top Layer w0.3: v1(-84.629,4.791) -84.629,4.866 -83.104,6.391 D200.1@-82.854,6.391
  Bottom Layer w0.3: R203.2@-85.554,6.242 -85.504,6.242 -85.254,5.992 -85.254,5.416 v1(-84.629,4.791) -80.462,4.791 -78.946,3.275 V200.2@-78.946,2.6
NetD201_1: D201.1 L200.1 | length 6.8
  Bottom Layer w0.3: L200.1@-83.179,9.192 -82.529,9.842 -81.919,9.842 -80.893,10.867 -77.818,10.867 -77.568,11.117 D201.1@-77.568,11.467
NetD202_1: D202.1 R206.2 V200.4 | length 7.5
  Top Layer w0.3: v1(-78.422,4.848) -78.422,4.906 -76.936,6.391 D202.1@-76.686,6.391
  Bottom Layer w0.3: R206.2@-79.318,6.242 -79.268,6.242 -79.018,5.992 -79.018,5.445 v1(-78.422,4.848) -78.364,4.791 -77.922,4.791 -76.406,3.275 V200.4@-76.406,2.6
NetD203_1: D203.1 L201.1 | length 4
  Bottom Layer w0.3: L201.1@-76.97,9.192 -76.42,9.192 -74.745,10.867 -74.318,10.867 -74.068,11.117 D203.1@-74.068,11.467
NetD204_1: D204.1 R211.2 V201.2 | length 12.1
  Top Layer w0.3: v1(-72.3,4.791) -72.3,4.86 -70.769,6.391 D204.1@-70.519,6.391
  Bottom Layer w0.3: R211.2@-73.062,6.367 -73.062,5.552 v1(-72.3,4.791) -67.354,4.791 -65.846,3.283 V201.2@-65.846,2.608
NetD205_1: D205.1 L202.1 | length 2.4
  Bottom Layer w0.3: L202.1@-70.76,9.192 -70.558,9.394 D205.1@-70.558,11.467
NetD206_1: D206.1 R214.2 V201.4 | length 8.9
  Top Layer w0.3: v1(-65.947,4.848) -65.889,4.906 -65.889,5.153 -65.54,5.502 -65.49,5.502 -64.601,6.391 D206.1@-64.351,6.391
  Bottom Layer w0.3: R214.2@-67.066,6.279 -67.029,6.243 -67.029,5.605 -66.33,4.906 -66.004,4.906 v1(-65.947,4.848) -65.865,4.848 -65.772,4.942 -64.29,4.942 -63.373,4.025 -63.373,2.676 V201.4@-63.306,2.608
NetD207_1: D207.1 L203.1 | length 3.7
  Bottom Layer w0.3: D207.1@-67.061,11.467 -67.061,11.117 -66.811,10.867 -66.775,10.867 -65.1,9.192 L203.1@-64.55,9.192
NetD208_1: D208.1 R219.2 V202.2 | length 12.7
  Top Layer w0.3: v1(-59.93,4.791) -59.835,4.887 -59.835,5.039 -59.785,5.039 -58.433,6.391 D208.1@-58.183,6.391
  Bottom Layer w0.3: R219.2@-60.609,6.21 -60.609,5.469 v1(-59.93,4.791) -56.935,4.791 -56.124,3.979 -53.464,3.979 -52.759,3.275 V202.2@-52.759,2.6
NetD209_1: D209.1 L204.1 | length 6.4
  Bottom Layer w0.3: D209.1@-63.565,11.467 -63.565,11.117 -62.815,10.367 -61.224,10.367 -60.049,9.192 L204.1@-58.341,9.192
NetD210_1: D210.1 R222.2 V202.4 | length 10.3
  Top Layer w0.3: v1(-54.569,4.899) -53.607,4.899 -53.607,5.049 -53.395,5.261 -53.395,5.311 -53.345,5.311 -53.345,5.336 -53.32,5.336 -52.265,6.391 D210.1@-52.015,6.391
  Bottom Layer w0.3: R222.2@-54.56,6.242 -54.569,6.232 v1(-54.569,4.899) -51.843,4.899 -50.219,3.275 V202.4@-50.219,2.6
NetD211_1: D211.1 L205.1 | length 9.1
  Bottom Layer w0.3: D211.1@-60.068,11.467 -60.068,11.117 -59.819,10.867 -59.309,10.867 -58.783,10.342 -55.069,10.342 -54.501,9.774 -52.713,9.774 L205.1@-52.131,9.192
NetD212_1: D212.1 R227.2 V203.2 | length 14.2
  Top Layer w0.3: v1(-48.131,4.899) -48.129,4.901 -47.438,4.901 -47.438,4.926 -47.24,5.124 -47.24,5.299 -47.19,5.299 -47.19,5.324 -47.165,5.324 -46.097,6.391 D212.1@-45.847,6.391
  Bottom Layer w0.3: R227.2@-48.142,6.237 -48.131,6.226 v1(-48.131,4.899) -47.365,4.133 -41.861,4.133 -41.653,3.925 -40.316,3.925 -39.666,3.275 V203.2@-39.666,2.6
NetD213_1: D213.1 L206.1 | length 11.8
  Bottom Layer w0.3: D213.1@-56.572,11.467 -56.572,11.117 -56.322,10.867 -54.121,10.867 -53.621,10.367 -48.72,10.367 -47.546,9.192 L206.1@-45.921,9.192
NetD214_1: D214.1 R230.2 V203.4 | length 10.5
  Top Layer w0.3: v1(-41.916,4.895) -41.911,4.901 -41.27,4.901 -41.27,4.926 -41.023,5.172 -41.023,5.347 -40.973,5.347 -40.973,5.372 -40.948,5.372 -39.929,6.391 D214.1@-39.679,6.391
  Bottom Layer w0.3: R230.2@-41.916,6.242 v1(-41.916,4.895) -38.747,4.895 -37.126,3.275 V203.4@-37.126,2.6
NetD215_1: D215.1 L207.1 | length 14.3
  Bottom Layer w0.3: D215.1@-53.076,11.467 -42.537,11.467 -40.262,9.192 L207.1@-39.712,9.192
NetD216_1: D216.1 R235.2 V204.2 | length 16.8
  Top Layer w0.3: v1(-25.054,4.767) -25.054,4.839 -23.652,6.241 D216.1@-23.402,6.241
  Bottom Layer w0.3: R235.2@-25.937,6.242 -25.84,6.145 -25.84,5.552 v1(-25.054,4.767) -24.279,3.992 -14.378,3.992 -13.662,3.275 V204.2@-13.662,2.6
NetD217_1: D217.1 L208.1 | length 2.3
  Bottom Layer w0.3: D217.1@-23.59,11.392 -23.59,9.385 L208.1@-23.372,9.167
NetD218_1: D218.1 R238.2 V204.4 | length 13
  Top Layer w0.3: v1(-18.229,4.742) -18.172,4.799 -17.486,4.799 -17.468,4.817 -17.31,4.975 -17.31,5 -17.285,5 -16.043,6.241 D218.1@-15.793,6.241
  Bottom Layer w0.3: R238.2@-18.308,6.242 -18.229,6.162 v1(-18.229,4.742) -12.588,4.742 -11.122,3.275 V204.4@-11.122,2.6
NetD219_1: D219.1 L209.1 | length 5.5
  Bottom Layer w0.3: D219.1@-20.09,11.392 -20.09,11.042 -19.84,10.792 -19.209,10.792 -17.584,9.167 L209.1@-15.752,9.167
NetD220_1: D220.1 R243.2 V205.2 | length 14.6
  Top Layer w0.3: D220.1@-5.383,5.942 -5.3,5.942 -4.45,5.092 v1(-4.45,4.1)
  Bottom Layer w0.3: R243.2@-10.68,6.242 -10.63,6.242 -10.38,5.992 -10.38,5.335 -9.145,4.1 -1.451,4.1 -0.625,3.275 V205.2@-0.625,2.6
NetD221_1: D221.1 L210.1 | length 9.6
  Bottom Layer w0.3: D221.1@-16.59,11.392 -16.59,11.042 -16.34,10.792 -14.402,10.792 -13.902,10.292 -9.807,10.292 -9.332,9.817 -8.682,9.167 L210.1@-8.132,9.167
NetD222_1: D222.1 R246.2 V205.4 | length 12.7
  Top Layer w0.3: v1(2.31,6.391) 4.411,6.391 D222.1@4.478,6.325
  Bottom Layer w0.3: R246.2@-3.052,6.242 -3.03,6.22 -2.393,6.22 -2.212,6.038 -2.212,5.422 -2.007,5.217 0.983,5.217 1.36,5.593 1.36,5.865 1.736,6.242 v1@2.16,6.242 ; V205.4@1.915,2.6 1.915,4.71 2.16,4.956 v1@2.16,6.242 ; v1(2.31,6.391) v1@2.16,6.242
NetD223_1: D223.1 L211.1 | length 13.4
  Bottom Layer w0.3: D223.1@-13.027,11.392 -3.287,11.392 -1.062,9.167 L211.1@-0.512,9.167
NetK300_1: K300.1 K300.2 L300.2 | length 4.8
  Bottom Layer w0.3: K300.1@-84.799,-34.068 K300.2@-84.799,-36.608 -84.787,-36.621 -82.592,-36.621 L300.2@-82.579,-36.633
NetK300_15: K300.15 L302.2 | length 2.9
  Bottom Layer w0.3: L302.2@-80.079,-36.633 -80.067,-36.621 -77.192,-36.621 K300.15@-77.179,-36.608
NetK300_16: K300.16 L304.2 | length 5.4
  Bottom Layer w0.3: L304.2@-81.329,-35.083 -81.329,-35.158 -80.629,-35.858 -78.741,-35.858 -77.179,-34.296 K300.16@-77.179,-34.068
NetK301_1: K301.1 K301.2 L301.2 | length 4.8
  Bottom Layer w0.3: K301.1@-71.816,-34.068 K301.2@-71.816,-36.608 -71.804,-36.621 -69.592,-36.621 L301.2@-69.579,-36.633
NetK301_15: K301.15 L303.2 | length 2.9
  Bottom Layer w0.3: L303.2@-67.079,-36.633 -67.067,-36.621 -64.209,-36.621 K301.15@-64.196,-36.608
NetK301_16: K301.16 L305.2 | length 5.2
  Bottom Layer w0.3: L305.2@-68.329,-35.083 -68.329,-35.158 -67.629,-35.858 -65.986,-35.858 K301.16@-64.196,-34.068
NetK302_1: K302.1 K302.2 L306.2 | length 4.8
  Bottom Layer w0.3: K302.1@-58.834,-34.068 K302.2@-58.834,-36.608 -58.821,-36.621 -56.592,-36.621 L306.2@-56.579,-36.633
NetK302_15: K302.15 L308.2 | length 2.9
  Bottom Layer w0.3: L308.2@-54.079,-36.633 -54.067,-36.621 -51.226,-36.621 K302.15@-51.214,-36.608
NetK302_16: K302.16 L310.2 | length 5.2
  Bottom Layer w0.3: L310.2@-55.329,-35.083 -55.329,-35.158 -54.629,-35.858 -53.004,-35.858 K302.16@-51.214,-34.068
NetK303_1: K303.1 K303.2 L307.2 | length 4.8
  Bottom Layer w0.3: K303.1@-45.851,-34.068 K303.2@-45.851,-36.608 -45.839,-36.621 -43.592,-36.621 L307.2@-43.579,-36.633
NetK303_15: K303.15 L309.2 | length 2.9
  Bottom Layer w0.3: L309.2@-41.079,-36.633 -41.067,-36.621 -38.244,-36.621 K303.15@-38.231,-36.608
NetK303_16: K303.16 L311.2 | length 5.2
  Bottom Layer w0.3: L311.2@-42.329,-35.083 -42.329,-35.158 -41.629,-35.858 -40.021,-35.858 K303.16@-38.231,-34.068
NetK304_1: K304.1 K304.2 L312.2 | length 4.6
  Bottom Layer w0.3: K304.1@-32.868,-34.068 K304.2@-32.868,-36.608 -32.856,-36.621 -30.842,-36.621 L312.2@-30.829,-36.633
NetK304_15: K304.15 L314.2 | length 3.1
  Bottom Layer w0.3: L314.2@-28.329,-36.633 -28.317,-36.621 -25.261,-36.621 K304.15@-25.248,-36.608
NetK304_16: K304.16 L316.2 | length 5.4
  Bottom Layer w0.3: L316.2@-29.579,-35.083 -29.579,-35.158 -28.879,-35.858 -27.038,-35.858 K304.16@-25.248,-34.068
NetK305_1: K305.1 K305.2 L313.2 | length 4.7
  Bottom Layer w0.3: K305.1@-19.886,-34.068 K305.2@-19.886,-36.608 -19.873,-36.621 -17.762,-36.621 L313.2@-17.749,-36.633
NetK305_15: K305.15 L315.2 | length 3
  Bottom Layer w0.3: L315.2@-15.249,-36.633 -15.237,-36.621 -12.278,-36.621 K305.15@-12.266,-36.608
NetK305_16: K305.16 L317.2 | length 5.3
  Bottom Layer w0.3: L317.2@-16.499,-35.083 -16.499,-35.158 -15.799,-35.858 -14.056,-35.858 K305.16@-12.266,-34.068
NetK306_1: K306.1 K306.2 L318.2 | length 4.6
  Bottom Layer w0.3: K306.1@-6.903,-34.068 K306.2@-6.903,-36.608 -6.89,-36.621 -4.842,-36.621 L318.2@-4.829,-36.633
NetK306_15: K306.15 L320.2 | length 3.1
  Bottom Layer w0.3: L320.2@-2.329,-36.633 -2.317,-36.621 0.705,-36.621 K306.15@0.717,-36.608
NetK306_16: K306.16 L322.2 | length 5.4
  Bottom Layer w0.3: L322.2@-3.579,-35.083 -3.579,-35.158 -2.879,-35.858 -1.073,-35.858 K306.16@0.717,-34.068
NetK307_1: K307.1 K307.2 L319.2 | length 4.7
  Bottom Layer w0.3: K307.1@6.08,-34.068 K307.2@6.08,-36.608 6.105,-36.583 8.146,-36.583 L319.2@8.171,-36.558
NetK307_15: K307.15 L321.2 | length 3
  Bottom Layer w0.3: L321.2@10.671,-36.558 10.696,-36.583 13.675,-36.583 K307.15@13.7,-36.608
NetK307_16: K307.16 L323.2 | length 5.4
  Bottom Layer w0.3: L323.2@9.421,-35.008 9.421,-35.083 10.121,-35.783 11.985,-35.783 K307.16@13.7,-34.068
NetK308_1: K308.1 K308.2 L324.2 | length 4.7
  Bottom Layer w0.3: K308.1@19.063,-34.068 K308.2@19.063,-36.608 19.075,-36.621 21.158,-36.621 L324.2@21.171,-36.633
NetK308_15: K308.15 L326.2 | length 3
  Bottom Layer w0.3: L326.2@23.671,-36.633 23.683,-36.621 26.67,-36.621 K308.15@26.683,-36.608
NetK308_16: K308.16 L328.2 | length 5.4
  Bottom Layer w0.3: L328.2@22.421,-35.083 22.421,-35.158 23.121,-35.858 24.893,-35.858 K308.16@26.683,-34.068
NetK309_1: K309.1 K309.2 L325.2 | length 4.6
  Bottom Layer w0.3: K309.1@32.045,-34.068 K309.2@32.045,-36.608 L325.2@34.151,-36.608
NetK309_15: K309.15 L327.2 | length 3
  Bottom Layer w0.3: L327.2@36.691,-36.608 K309.15@39.665,-36.608
NetK309_16: K309.16 L329.2 | length 5.3
  Bottom Layer w0.3: L329.2@35.421,-35.058 35.421,-35.133 35.621,-35.333 35.696,-35.333 36.196,-35.833 37.9,-35.833 K309.16@39.665,-34.068
NetK310_1: K310.1 K310.2 L330.2 | length 4.7
  Bottom Layer w0.3: K310.1@45.028,-34.068 K310.2@45.028,-36.608 45.041,-36.621 47.158,-36.621 L330.2@47.171,-36.633
NetK310_15: K310.15 L332.2 | length 3
  Bottom Layer w0.3: L332.2@49.671,-36.633 49.683,-36.621 52.636,-36.621 K310.15@52.648,-36.608
NetK310_16: K310.16 L334.2 | length 5.3
  Bottom Layer w0.3: L334.2@48.421,-35.083 48.421,-35.158 49.121,-35.858 50.858,-35.858 K310.16@52.648,-34.068
NetK311_1: K311.1 K311.2 L331.2 | length 4.7
  Bottom Layer w0.3: K311.1@58.011,-34.068 K311.2@58.011,-36.608 L331.2@60.171,-36.608
NetK311_15: K311.15 L333.2 | length 3
  Bottom Layer w0.3: L333.2@62.671,-36.633 62.683,-36.621 65.618,-36.621 K311.15@65.631,-36.608
NetK311_16: K311.16 L335.2 | length 5.3
  Bottom Layer w0.3: L335.2@61.421,-35.058 61.421,-35.133 62.146,-35.858 63.841,-35.858 K311.16@65.631,-34.068
NetL200_2: L200.2 R201.2 R203.1 | length 5.2
  Bottom Layer w0.3: R201.2@-86.879,6.242 -86.829,6.242 -86.579,6.492 -86.579,6.797 -85.854,7.522 -85.854,7.592 -85.604,7.842 -85.554,7.842 -85.304,7.592 -84.929,7.592 -83.729,6.392 L200.2@-83.179,6.392
NetL201_2: L201.2 R205.2 R206.1 | length 5.2
  Bottom Layer w0.3: R205.2@-80.693,6.242 -80.643,6.242 -80.118,6.767 -80.118,7.072 -79.893,7.297 -79.893,7.316 -79.368,7.842 -79.318,7.842 -79.068,7.592 -78.72,7.592 -77.52,6.392 L201.2@-76.97,6.392
NetL202_2: L202.2 R209.2 R211.1 | length 5.1
  Bottom Layer w0.3: R209.2@-74.343,6.367 -74.293,6.367 -73.862,6.799 -73.862,7.104 -73.543,7.422 -73.543,7.486 -73.362,7.667 -73.362,7.717 -73.112,7.967 R211.1@-73.062,7.967 -72.812,7.717 -72.636,7.717 -71.31,6.392 L202.2@-70.76,6.392
NetL203_2: L203.2 R213.2 R214.1 | length 5.4
  Bottom Layer w0.3: R213.2@-68.519,6.242 -68.468,6.242 -68.218,6.492 -68.218,6.777 -67.116,7.879 -67.066,7.879 -67.016,7.879 -66.178,7.042 -65.2,7.042 L203.2@-64.55,6.392
NetL204_2: L204.2 R217.2 R219.1 | length 5.1
  Bottom Layer w0.3: R217.2@-61.889,6.242 -61.839,6.242 -61.589,6.492 -61.589,6.779 -60.909,7.46 -60.909,7.56 -60.659,7.81 -60.559,7.81 -60.309,7.56 -60.309,7.461 -59.883,7.035 -58.984,7.035 L204.2@-58.341,6.392
NetL205_2: L205.2 R221.2 R222.1 | length 5.2
  Bottom Layer w0.3: R221.2@-55.951,6.367 -55.901,6.367 -55.651,6.617 -55.651,6.667 -55.151,7.167 -55.151,7.3 -54.86,7.592 -54.86,7.717 -54.735,7.842 -54.509,7.842 -54.26,7.592 -54.26,7.542 -53.713,6.995 -52.735,6.995 L205.2@-52.131,6.392
NetL206_2: L206.2 R225.2 R227.1 | length 5.3
  Bottom Layer w0.3: R225.2@-49.557,6.237 -49.507,6.237 -49.257,6.487 -49.257,6.852 -48.442,7.667 -48.442,7.717 -48.192,7.967 -48.092,7.967 -47.842,7.717 -47.842,7.667 -47.216,7.042 -46.571,7.042 L206.2@-45.921,6.392
NetL207_2: L207.2 R229.2 R230.1 | length 5
  Bottom Layer w0.3: R229.2@-43.313,6.253 -43.263,6.253 -43.013,6.503 -43.013,6.795 -41.966,7.842 -41.916,7.842 -41.666,7.592 -41.462,7.592 -40.262,6.392 L207.2@-39.712,6.392
NetL208_2: L208.2 R233.2 R235.1 | length 5.4
  Bottom Layer w0.3: R233.2@-27.377,6.242 -27.327,6.242 -27.077,6.492 -27.077,6.752 -25.987,7.842 R235.1@-25.937,7.842 -25.687,7.592 -25.147,7.592 -23.922,6.367 L208.2@-23.372,6.367
NetL209_2: L209.2 R237.2 R238.1 | length 5.4
  Bottom Layer w0.3: R237.2@-19.788,6.242 -19.738,6.242 -19.488,6.492 -19.488,6.712 -18.358,7.842 R238.1@-18.308,7.842 -18.058,7.592 -17.527,7.592 -16.302,6.367 L209.2@-15.752,6.367
NetL210_2: L210.2 R241.2 R243.1 | length 5.4
  Bottom Layer w0.3: R241.2@-12.2,6.242 -12.15,6.242 -11.9,6.492 -11.9,6.672 -10.73,7.842 R243.1@-10.68,7.842 -10.43,7.592 -9.907,7.592 -8.682,6.367 L210.2@-8.132,6.367
NetL211_2: L211.2 R245.2 R246.1 | length 5.5
  Bottom Layer w0.3: R245.2@-4.611,6.242 -4.561,6.242 -4.311,6.492 -4.311,6.632 -3.102,7.842 R246.1@-3.052,7.842 -2.802,7.592 -2.287,7.592 -1.062,6.367 L211.2@-0.512,6.367
NetR200_1: R200.1 R202.1 V200.7 | length 4.1
  Top Layer w0.3: v1(-79.561,-3.726) -79.528,-3.694 -79.318,-3.694 -78.858,-3.233 R202.1@-78.699,-3.233 R200.1@-78.699,-1.751
  Bottom Layer w0.3: v1(-79.561,-3.726) -79.561,-3.689 -78.946,-3.075 V200.7@-78.946,-2.4
NetR204_1: R204.1 R207.1 V200.5 | length 9.1
  Top Layer w0.3: R207.1@-82.704,-3.233 R204.1@-82.704,-1.751 v1(-81.392,-1.751)
  Bottom Layer w0.3: v1(-81.392,-1.751) -81.392,-1.672 -80.794,-1.075 -77.056,-1.075 -76.406,-1.725 V200.5@-76.406,-2.4
NetR208_1: R208.1 R210.1 V201.7 | length 5.7
  Top Layer w0.3: v1(-67.622,-4.428) R210.1@-67.622,-3.233 R208.1@-67.622,-1.751
  Bottom Layer w0.3: v1(-67.622,-4.428) -67.54,-4.428 -67.111,-3.999 -66.778,-3.999 -65.846,-3.067 V201.7@-65.846,-2.392
NetR212_1: R212.1 R215.1 V201.5 | length 10.7
  Top Layer w0.3: R215.1@-70.568,-3.233 R212.1@-70.568,-1.751 -70.568,-1.801 -70.318,-2.051 -69.799,-2.051 -69.649,-2.201 v1(-69.568,-2.201)
  Bottom Layer w0.3: v1(-69.568,-2.201) -69.568,-2.163 -69.057,-1.651 -69.057,-1.439 -68.515,-0.898 -64.125,-0.898 -63.306,-1.717 V201.5@-63.306,-2.392
NetR216_1: R216.1 R218.1 V202.7 | length 13.3
  Top Layer w0.3: v1(-59.565,-4.568) -59.43,-4.568 -59.022,-4.16 -56.496,-4.16 ; v1(-56.991,-1.667) -55.453,-1.667 R216.1@-55.369,-1.751 R218.1@-55.369,-3.146 ; -56.496,-4.185 -56.306,-3.995 -56.081,-3.995 -55.369,-3.283 R218.1@-55.369,-3.233
  Bottom Layer w0.3: v1(-56.991,-1.667) -56.933,-1.609 -56.283,-1.609 -56.091,-1.417 -54.816,-1.417 -54.474,-1.075 -53.409,-1.075 -52.759,-1.725 V202.7@-52.759,-2.4
NetR220_1: R220.1 R223.1 V202.5 | length 12.6
  Top Layer w0.3: R220.1@-58.383,-1.751 R223.1@-58.383,-3.233 -58.383,-3.183 -58.133,-2.933 -57.591,-2.933 -57.472,-2.815 v1(-57.39,-2.815)
  Bottom Layer w0.3: v1(-57.39,-2.815) -57.333,-2.872 -57.333,-3.226 -56.827,-3.732 -53.905,-3.732 -53.168,-4.468 -50.658,-4.468 -50.204,-4.015 -50.204,-2.415 V202.5@-50.219,-2.4
NetR224_1: R224.1 R226.1 V203.7 | length 8.5
  Top Layer w0.3: v1(-44.264,-1.708) -43.124,-1.708 R224.1@-43.116,-1.701 ; R226.1@-43.116,-3.233 R224.1@-43.116,-1.751
  Bottom Layer w0.3: v1(-44.264,-1.708) -44.206,-1.651 -43.556,-1.651 -43.364,-1.458 -42.465,-1.458 -42.057,-1.051 -40.341,-1.051 -39.666,-1.725 V203.7@-39.666,-2.4
NetR228_1: R228.1 R231.1 V203.5 | length 13.7
  Top Layer w0.3: R228.1@-46.047,-1.751 R231.1@-46.047,-3.233 -46.047,-3.283 -45.173,-4.158 -45.021,-4.158 -44.46,-4.718 v1(-44.46,-5.618)
  Bottom Layer w0.3: v1(-44.46,-5.618) -43.31,-4.468 -38.519,-4.468 -37.126,-3.075 V203.5@-37.126,-2.4
NetR232_1: R232.1 R234.1 V204.7 | length 12.1
  Top Layer w0.3: R232.1@-21.697,-1.751 -21.697,-3.283 -20.804,-4.176 -20.804,-4.662 v1(-20.747,-4.719)
  Bottom Layer w0.3: v1(-20.747,-4.719) -20.706,-4.76 -19.997,-4.76 -19.697,-5.06 -16.844,-5.06 -15.93,-4.146 -15.009,-4.146 -14.995,-4.16 -14.747,-4.16 -13.662,-3.075 V204.7@-13.662,-2.4
NetR236_1: R236.1 R239.1 V204.5 | length 20.1
  Top Layer w0.3: R239.1@-24.537,-3.283 -24.287,-3.533 -24.237,-3.533 -22.051,-5.719 -18.329,-5.719 -16.582,-3.972 v1(-16.582,-1.975) ; R239.1@-24.537,-3.233 R236.1@-24.537,-1.751
  Bottom Layer w0.3: v1(-16.582,-1.975) -16.582,-1.894 -16.282,-1.595 -16.282,-1.426 -15.932,-1.075 -11.772,-1.075 -11.122,-1.725 V204.5@-11.122,-2.4
NetR240_1: R240.1 R242.1 V205.7 | length 8.4
  Top Layer w0.3: v1(-4.167,-3.375) -4.086,-3.375 -3.661,-2.95 -2.442,-2.95 -2.192,-2.7 R242.1@-2.192,-2.65 ; R242.1@-2.192,-2.6 R240.1@-2.192,-1.167
  Bottom Layer w0.3: v1(-4.167,-3.375) -4.11,-3.432 -3.56,-3.432 -3.267,-3.725 -1.275,-3.725 -0.625,-3.075 V205.7@-0.625,-2.4